# Altium PCB PCB5.PcbDoc
Units mil, origin at the board's own origin, x right, y up, seen from the top; angles counter-clockwise.
Board outline 6000 x 4000 mil, 2 copper layers (Top Layer, Bottom Layer); 31 components, 16 nets, 85 pads, 0 vias.
Unrouted connection lines stored in the file: 60.
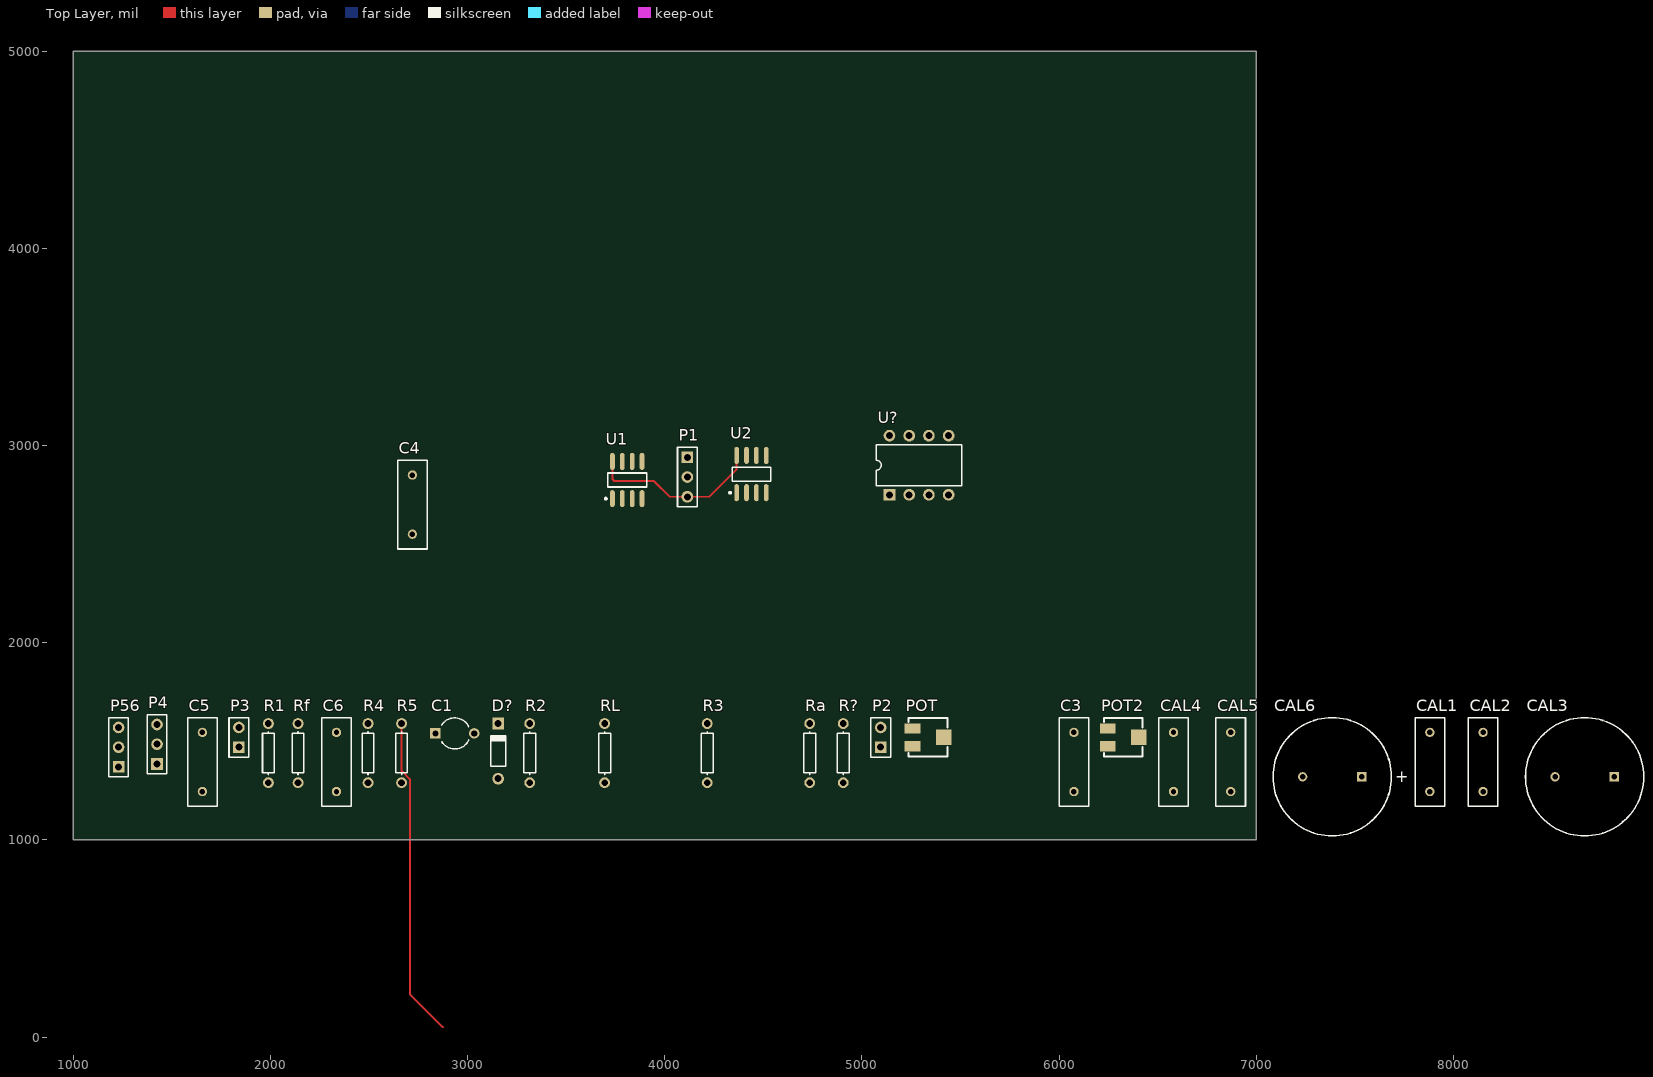
[diagram p0: Top Layer view]
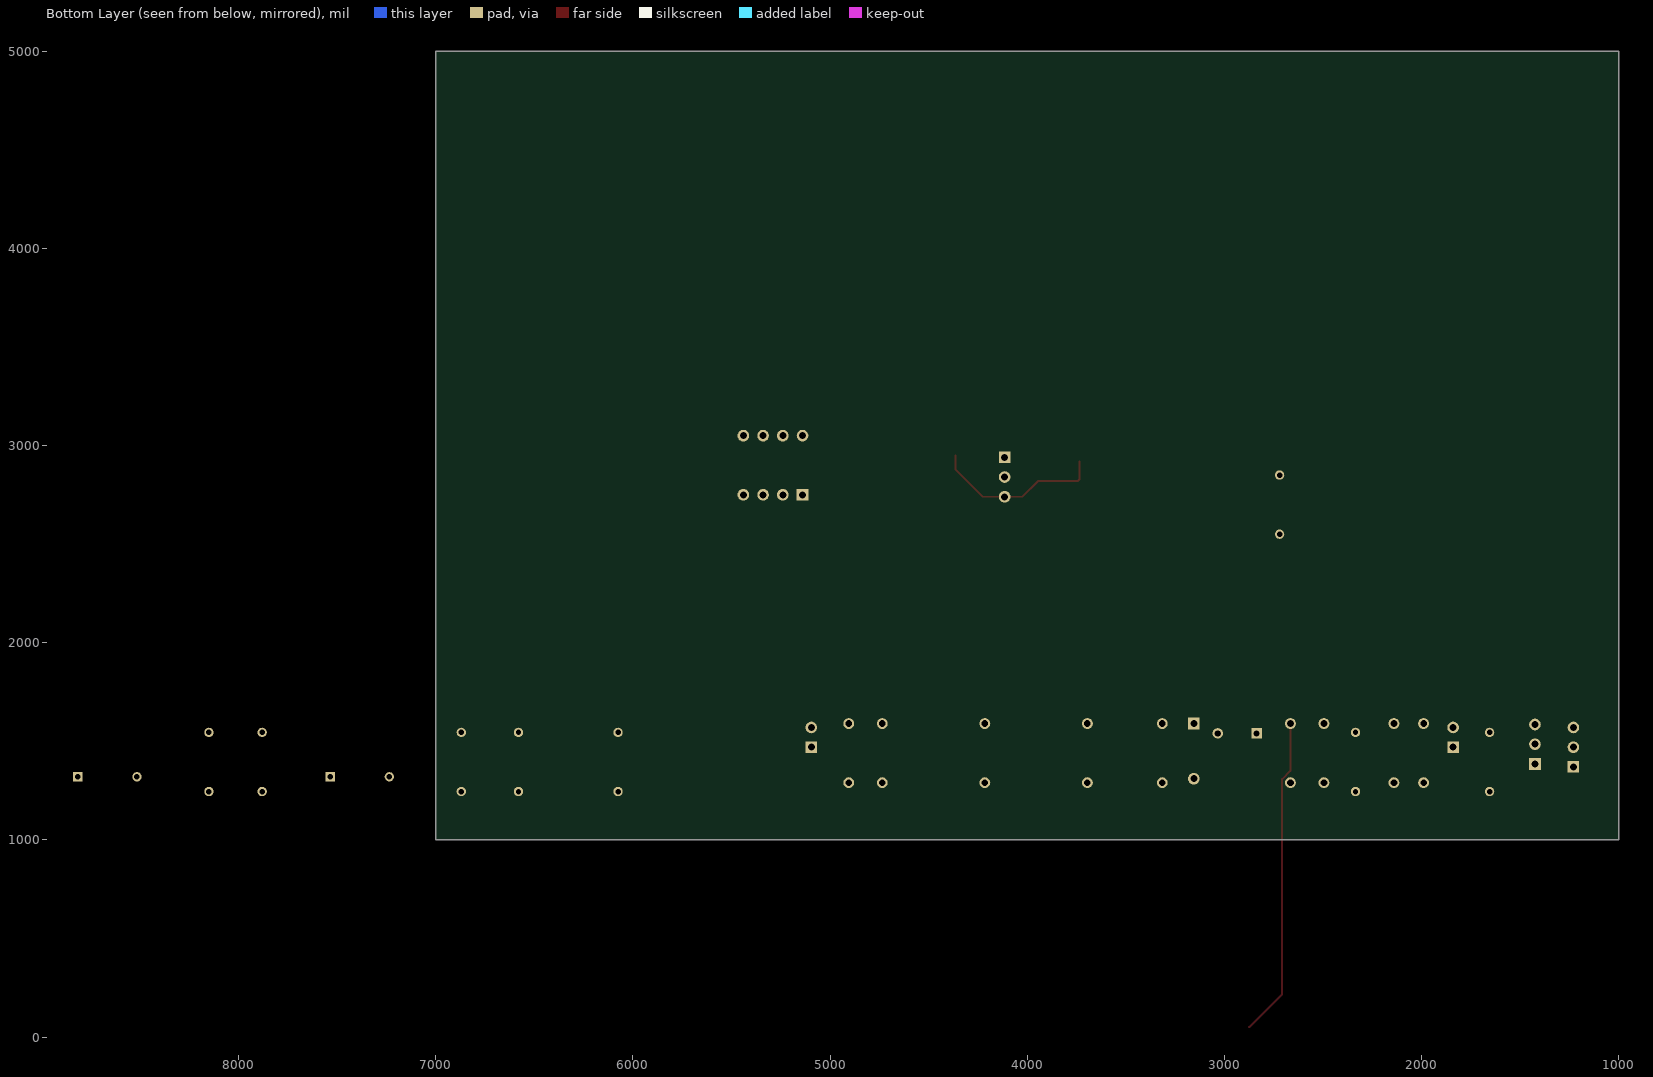
[diagram p1: Bottom Layer view, seen from below]

## Layer stack, top to bottom
Top Solder: solder mask 0.4, Solder Resist, Dk 3.5
Top Layer: signal copper 1.4
Dielectric 1: dielectric 12.6, FR-4, Dk 4.8
Bottom Layer: signal copper 1.4
Bottom Solder: solder mask 0.4, Solder Resist, Dk 3.5

## Board outline
1000,1000 7000,1000 7000,5000 1000,5000

## Design rules (kind name [scope] priority, off if disabled: settings)
Clearance [All] p1: gap=10 ignorepadtopadclearanceinfootprint=FALSE except(0: Arc-Hole Track-Hole SMDPad-Hole THPad-Hole Via-Hole Fill-Hole Poly-Hole Region-Hole Text-Hole)
PolygonConnect [All] p1: connectstyle=Relief reliefconductorwidth=10 reliefentries=4 polygonreliefangle="90 Angle" airgapwidth=10
RoomDefinition Sheet1 [InComponentClass('Sheet1')] p1: confinementstyle=ConfineIn formatcopy=TRUE lockcomponents=FALSE outline 995,1010 6985,1010 6985,4985 995,4985
RoutingVias [All] p1: holewidth=28 width=50 viastyle="Through Hole" minholewidth=28 minwidth=50 maxholewidth=28 maxwidth=50
SolderMaskExpansion [All] p1: expansion=4
Width [All] p1: maxlimit=10 minlimit=10 preferedwidth=10
30 further rules are at their usual default settings.

## Components (designator, comment, footprint, x,y, rotation, side; value= is the part's Value field where it differs from the comment)
C1 "Cap Pol2" CAPR5-4X5 2935.51,1540 r0 top value=1uF
C3 "Cap Banda" RAD-0.3 6075.51,1395 r90 top value=100nF
C4 "Cap Banda" RAD-0.3 2720.51,2700 r90 top value=100nF
C5 "Cap LPF" RAD-0.3 1655.51,1395 r90 top value=100nF
C6 "Cap LPF" RAD-0.3 2335.51,1395 r90 top value=100nF
CAL1 "Cap" RAD-0.3 7880.51,1395 r90 top value=100nF
CAL2 "Cap" RAD-0.3 8150.51,1395 r90 top value=100pF
CAL3 "Cap Pol1" RB7.6-15 8665.51,1320 r0 top value=100uF
CAL4 "Cap" RAD-0.3 6580.51,1395 r90 top value=100nF
CAL5 "Cap" RAD-0.3 6870.51,1395 r90 top value=100pF
CAL6 "Cap Pol1" RB7.6-15 7385.51,1320 r0 top value=100uF
D? "Diode 1N4148" DO-35 3155.51,1450 r90 top
P1 "Header 3" HDR1X3 4115,2940 r270 top
P2 "Senal" HDR1X2 5095.51,1470 r90 top
P3 "OUTPUT SEÑAL" HDR1X2 1840.51,1470 r90 top
P4 "Tramos" HDR1X3 1425.51,1385 r90 top
P56 "Header 3" HDR1X3 1230.51,1370 r90 top
POT "RPot SM" POT4MM-2 5335.51,1520 r0 top
POT2 "POT UMBRAL" POT4MM-2 6325.51,1520 r0 top
R1 "Res1" AXIAL-0.3 1990.51,1440 r90 top value=10
R2 "R1 Banda" AXIAL-0.3 3315.51,1440 r90 top value=470
R3 "Res1" AXIAL-0.3 4215.51,1440 r90 top value=1K
R4 "R" AXIAL-0.3 2495.51,1440 r90 top value=10K
R5 "R" AXIAL-0.3 2665.51,1440 r90 top value=10K
R? "Res1" AXIAL-0.3 4905.51,1440 r90 top value=1K
Ra "Res1" AXIAL-0.3 4735.51,1440 r90 top value=5.6k
Rf "Res1" AXIAL-0.3 2140.51,1440 r90 top value=1K
RL "Res1" AXIAL-0.3 3695.51,1440 r90 top value=1K
U1 "TL082AMD" SO8_N 3810,2825 r90 top
U2 "TL082AMD" SO8_N 4440,2855 r90 top
U? "LM311N" DIP8 5290,2900 r0 top

## Footprints (in the part's own frame and the unit in brackets; to place one, negate y for a bottom-side part, rotate by r counter-clockwise, add the part's x,y. Pads: shape width x height; smd on the part's side, far side on the other; paste and mask are expansions set on the pad)
AXIAL-0.3 [mm] "Axial Device, Thru-Hole; 2 Leads; 0.3 in Pin Spacing"
  round 1.4 hole 0.85: 1(-3.81,0) 2(3.81,0)
  silkscreen extent -2.77,-0.76 2.77,0.76
CAPR5-4X5 [mm] "Capacitor; 2 Leads"
  rect 1.35x1.35 hole 0.8: 1(-2.5,0)
  round 1.35 hole 0.8: 2(2.5,0)
  silkscreen extent -1.69,-2 1.82,2
DIP8 [mm] "DIP; 8 Leads; Row Spacing 7.62 mm; Pitch 2.54 mm"
  rect 1.5x1.5 hole 0.9: 1(-3.81,-3.81)
  round 1.5 hole 0.9: 2(-1.27,-3.81) 3(1.27,-3.81) 4(3.81,-3.81) 5(3.81,3.81) 6(1.27,3.81) 7(-1.27,3.81) 8(-3.81,3.81)
  silkscreen extent -5.5,-2.65 5.5,2.65
DO-35 [mm] "Diode, Axial; Body 3.8 x 1.9 mm (LxDia. max), Lead Dia. 0.53 mm (max)"
  round 1.5 hole 0.9: 1(-3.55,0)
  rect 1.5x1.5 hole 0.9: 2(3.55,0)
  silkscreen extent -1.95,-0.95 2.05,0.95
HDR1X2 [mm] "Connector; Header; 2 Position"
  rect 1.5x1.5 hole 0.9: 1(0,0)
  round 1.5 hole 0.9: 2(2.54,0)
  silkscreen extent -1.27,-1.27 3.81,1.27
HDR1X3 [mm] "Connector; Header; 3 Position"
  rect 1.5x1.5 hole 0.9: 1(0,0)
  round 1.5 hole 0.9: 2(2.54,0) 3(5.08,0)
  silkscreen extent -1.27,-1.27 6.35,1.27
POT4MM-2 [mm] "Square Trimming Potentiometer"
  rect 2x1.3 smd: CCW(-2,-1.15) CW(-2,1.15)
  rect 2x2 smd: W(2,0)
  silkscreen extent -2.5,-2.5 2.5,2.5
RAD-0.3 [mm] "Radial Cap, Thru-Hole; 2 Leads; 0.3 in Pin Spacing"
  round 1.2 hole 0.7: 1(-3.81,0) 2(3.81,0)
  silkscreen extent -5.71,-1.91 5.71,1.91
RB7.6-15 [mm] "Polarized Capacitor (Radial); 2 Leads"
  rect 1.2x1.2 hole 0.7: 1(3.81,0)
  round 1.2 hole 0.7: 2(-3.81,0)
  silkscreen extent -7.62,-7.62 7.62,7.62
SO8_N [mm] "SOIC, 8-Leads, Body 4.9x3.9mm, Pitch 1.27mm, IPC Medium Density"
  oval 2.2x0.6 smd: 1(-2.4,1.905) 2(-2.4,0.635) 3(-2.4,-0.635) 4(-2.4,-1.905) 5(2.4,-1.905) 6(2.4,-0.635) 7(2.4,0.635) 8(2.4,1.905)
  silkscreen extent -2.52,-2.5 0.9,2.88, body extent -1.95,-2.45 1.95,2.45, height 1.75

## Part data
C1: "Polarized Capacitor (Axial)", LatestRevisionDate=17-Jul-2002, LatestRevisionNote="Re-released for DXP Platform.", PackageDescription="Polarized Capacitor; 2 Leads", PackageReference=POLAR0.8, Published=8-Jun-2000, Publisher="Altium Limited"
C3 C4 C5 C6: library part Cap, "Capacitor", LatestRevisionDate=17-Jul-2002, LatestRevisionNote="Re-released for DXP Platform.", PackageDescription="Radial Cap, Thru-Hole; 2 Leads; 0.3 in Pin Spacing", PackageReference=RAD-0.3, Published=8-Jun-2000, Publisher="Altium Limited"
CAL1 CAL2 CAL4 CAL5: "Capacitor", LatestRevisionDate=17-Jul-2002, LatestRevisionNote="Re-released for DXP Platform.", PackageDescription="Radial Cap, Thru-Hole; 2 Leads; 0.3 in Pin Spacing", PackageReference=RAD-0.3, Published=8-Jun-2000, Publisher="Altium Limited"
CAL3 CAL6: "Polarized Capacitor (Radial)", LatestRevisionDate=17-Jul-2002, LatestRevisionNote="Re-released for DXP Platform.", PackageDescription="Polarized Capacitor (Radial); 2 Leads", PackageReference=RB7.6-15, Published=8-Jun-2000, Publisher="Altium Limited"
D?: "High Conductance Fast Diode", Code_JEDEC=DO-204-AH, ComponentLink1Description="Manufacturer Link", ComponentLink1URL=http://www.fairchildsemi.com/, ComponentLink2Description=Datasheet, ComponentLink2URL=http://www.fairchildsemi.com/ds/1N%2F1N4148.pdf, DatasheetVersion=1997, LatestRevisionDate=17-Jul-2002, LatestRevisionNote="Re-released for DXP Platform.", PackageDescription="Diode, Axial; Body 3.8 x 1.9 mm (LxDia. max), Lead Dia. 0.53 mm (max)", PackageReference=DO-35, Published=8-Jun-2000, Publisher="Altium Limited"
P1 P56: "Header, 3-Pin", LatestRevisionDate=17-Jul-2002, LatestRevisionNote="Re-released for DXP Platform.", Publisher="Altium Limited"
P2 P3: library part "Header 2", "Header, 2-Pin", LatestRevisionDate=17-Jul-2002, LatestRevisionNote="Re-released for DXP Platform.", Publisher="Altium Limited"
P4: library part "Header 3", "Header, 3-Pin", LatestRevisionDate=17-Jul-2002, LatestRevisionNote="Re-released for DXP Platform.", Publisher="Altium Limited"
POT: "Square Trimming Potentiometer", ComponentLink1Description="Manufacturer Link", ComponentLink1URL=http://bourns.com/2/search.html, DatasheetVersion=Oct-2003, PackageDescription="Square Trimming Potentiometer", PackageReference=POT4MM-2, Published=17-Dec-2003, Publisher="Altium Limited"
POT2: library part "RPot SM", "Square Trimming Potentiometer", ComponentLink1Description="Manufacturer Link", ComponentLink1URL=http://bourns.com/2/search.html, DatasheetVersion=Oct-2003, PackageDescription="Square Trimming Potentiometer", PackageReference=POT4MM-2, Published=17-Dec-2003, Publisher="Altium Limited"
R1 R3 R? Ra Rf RL: "Resistor", LatestRevisionDate=17-Jul-2002, LatestRevisionNote="Re-released for DXP Platform.", PackageDescription="Axial Device, Thru-Hole; 2 Leads; 0.3 in Pin Spacing", PackageReference=AXIAL-0.3, Published=8-Jun-2000, Publisher="Altium Limited"
R2 R4 R5: library part Res1, "Resistor", LatestRevisionDate=17-Jul-2002, LatestRevisionNote="Re-released for DXP Platform.", PackageDescription="Axial Device, Thru-Hole; 2 Leads; 0.3 in Pin Spacing", PackageReference=AXIAL-0.3, Published=8-Jun-2000, Publisher="Altium Limited"
U1 U2: "General-Purpose J-FET Dual Operational Amplifier", Code_IPC=SOIC127P600-8, Code_JEDEC=MS-012-AA, ComponentLink1Description="Manufacturer Link", ComponentLink1URL=http://www.st.com/, ComponentLink2Description=Datasheet, ComponentLink2URL=http://www.st.com/stonline/products/literature/ds/2300/tl082.pdf, DatasheetVersion=Jan-1999, LatestRevisionDate=13-Apr-2006, LatestRevisionNote="IPC-7351 Footprint Added.", PackageDescription="8-Pin Small Outline Integrated Circuit 1.27 mm Pitch", PackageReference=SO8, PackageVersion=Dec-2002, Published=24-Aug-2001, Publisher="Altium Limited"
U?: "Voltage Comparator", Code_JEDEC=MO-001-AN, ComponentLink1Description="Manufacturer Link", ComponentLink1URL=http://www.st.com/, ComponentLink2Description=Datasheet, ComponentLink2URL=http://www.st.com/stonline/products/literature/ds/4848/lm211.pdf, DatasheetVersion=Oct-1997, LatestRevisionDate=06-Jun-2005, LatestRevisionNote="Stylized 3D Model Added.", PackageDescription="DIP; 8 Leads; Row Spacing 7.62 mm; Pitch 2.54 mm", PackageReference=DIP8, Published=24-Aug-2001, Publisher="Altium Limited"

## Nets (pads, with @x,y where several pads share a name; then routed paths per layer and width w, separated by ;. In a path a pad name is that pad's centre, name@x,y a point inside that pad or via, vN(x,y) a via of type N, cw(c..) or ccw(c..) an arc to the next point about the centre after c; other vN are vias at no path point)
+5: CAL4.1 CAL5.1 CAL6.1 P1.3 P56.1 POT2.CW R?.2 U1.8 U2.8 U?.8 | length 884.2
  Top Layer w10: U1.8 3735,2830 3745,2820 3945,2820 4025,2740 P1.3 4225,2740 4365,2880 U2.8
-5: CAL1.2 CAL2.2 CAL3.2 P1.2 P56.2 U1.4 U2.4 U?.4
GND: C6.1 CAL1.1 CAL2.1 CAL3.1 CAL4.2 CAL5.2 CAL6.2 P1.1 P56.3 POT2.CCW R1.1 Ra.1 Rf.1 RL.1 U2.5 U?.1
NetC1_1: C1.1 P2.1 P2.2 R1.2
NetC1_2: C1.2 Rf.2 U1.3
NetC3_1: C3.1 C4.1 R2.2
NetC3_2: C3.2 D?.1 P4.2 R3.2 U2.7
NetC4_2: C4.2 R3.1 U2.6
NetC5_1: C5.1 R4.2 R5.1
NetC5_2: C5.2 U2.1 U2.2 U?.2
NetC6_2: C6.2 R5.2 U2.3 | length 1626.8
  Top Layer w10: R5.2 2665.51,1350.19 2708.07,1307.63 2708.07,216.93 2875,50
NetD?_2: D?.2 P4.1 R4.1 RL.2
NetP3_2: P3.2 R?.1 U?.7
NetP4_3: P4.3 POT.W R2.1 U1.1
NetPOT2_W: POT2.W U?.3
NetPOT_CCW: POT.CCW Ra.2 U1.2
pads on no net: P3.1 POT.CW U1.5 U1.6 U1.7 U?.5 U?.6

## Text inside footprints (layer, text, board x,y; h text height)
CAL3: Top Overlay "+" at 8985.67,1290.99 h59.06
CAL6: Top Overlay "+" at 7705.67,1290.99 h59.06